# Altium PCB w47_LED_RGB_pinout.PcbDoc (part 2 of 2)
Units mm, origin at the board's own origin, x right, y up, seen from the top; angles counter-clockwise.
Board outline 167.64 x 288.93 mm, 2 copper layers (Top Layer, Bottom Layer); 100 components, 123 nets, 258 pads, 0 vias.
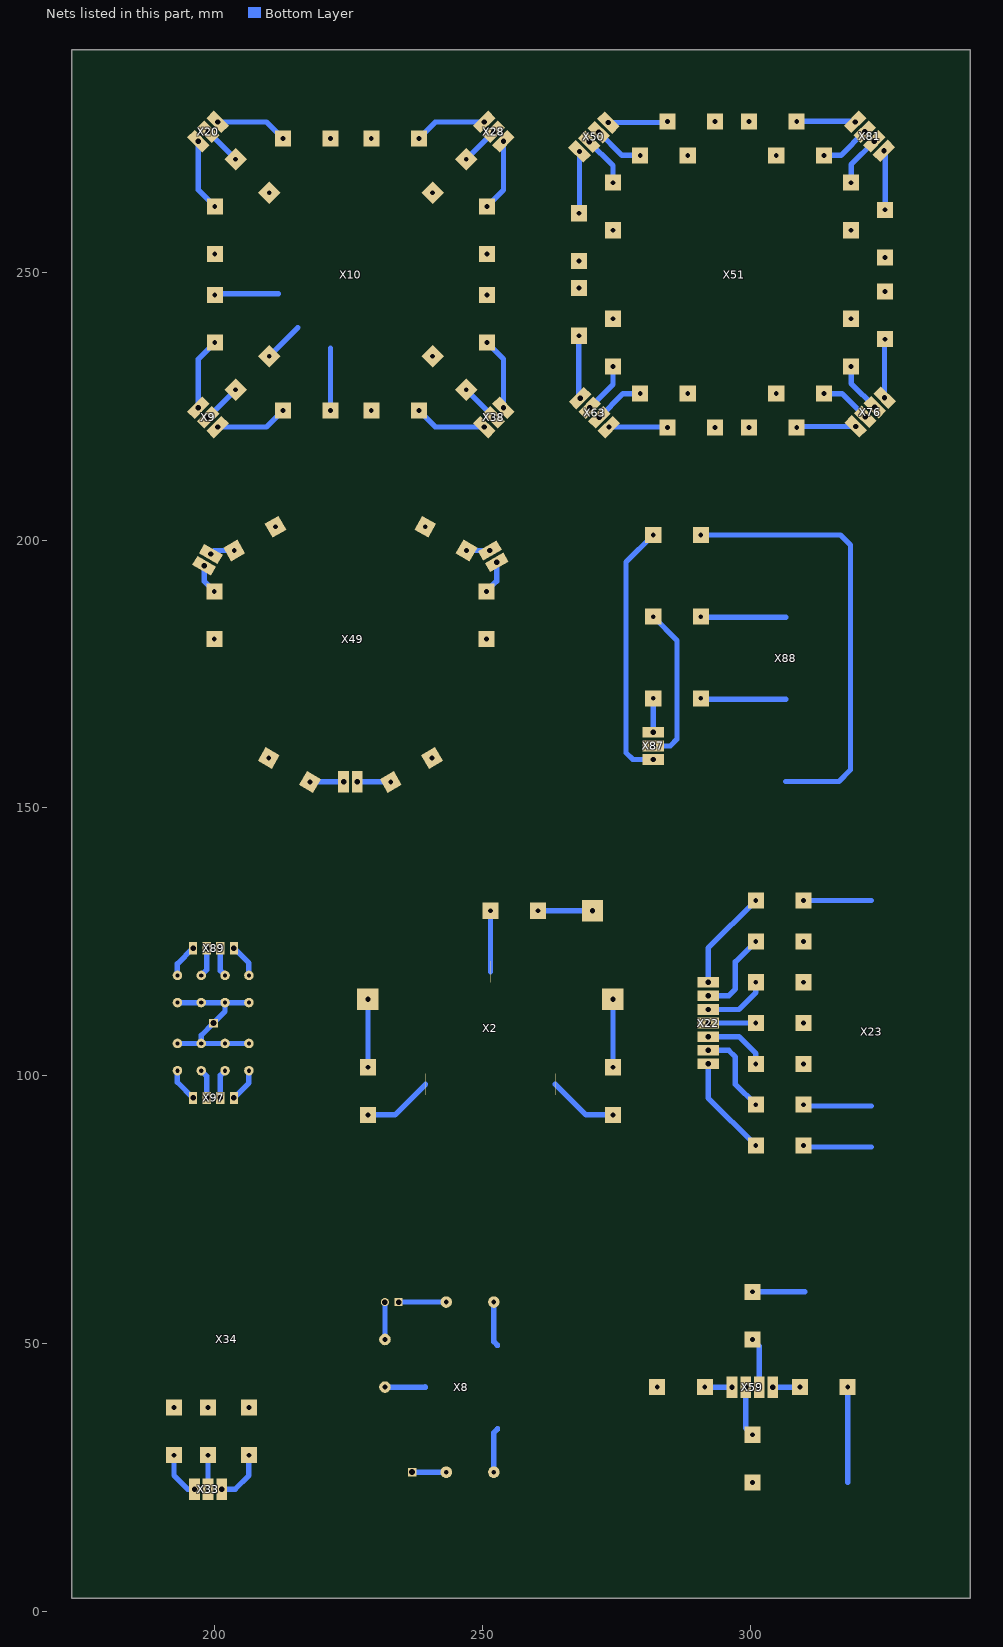
[diagram p2: the nets of this part, all layers, seen from the top]

## Part data
X1 X4 X7 X11 X17 X48 X56 X67 X101: "WR-PHD 2.54 mm Angled Socket Header", Manufacturer="Würth Elektronik eiSos GmbH", partNo=613002143121, ComponentLink1 Description=Manufacturer, ComponentLink1URL=http://www.we-online.com, ComponentLink2 Description=Datasheet, ComponentLink2URL=http://katalog.we-online.de/em/datasheet/6130xx143121.pdf, Created by="Karrer Zheng", Created Date="29 March 2013", NoPins=02
X2: library part MediumQTouchWheel, ConfigurationParameters==__sensorid[8]=odiameter[30]=idiameter[10]=gapthickness[0.3]=, ConfiguratorName=ATMEL_TOUCH
X3 X5 X6 X12 X13 X15 X16 X18 X19 X21 X24 X25 X26 X27 X29 X30 X31 X32 X35 X36 X37 X39 X40 X41 X42 X43 X44 X45 X52 X53 X54 X55 X57 X58 X60 X61 X62 X64 X65 X66 X68 X69 X70 X72 X73 X75 X77 X78 X79 X80 X82 X83 X84 X85 X91 X92 X93: "di?n tr? size nh?"
X8: library part SmallQTouchWheel, ConfigurationParameters==__sensorid[7]=diameter[20]=, ConfiguratorName=ATMEL_TOUCH
X9 X20 X28 X33 X38 X87: "WR-PHD 2.54 mm Angled Socket Header", Manufacturer="Würth Elektronik eiSos GmbH", partNo=613003143121, ComponentLink1 Description=Manufacturer, ComponentLink1URL=http://www.we-online.com, ComponentLink2 Description=Datasheet, ComponentLink2URL=http://katalog.we-online.de/em/datasheet/6130xx143121.pdf, Created by="Karrer Zheng", Created Date="29 March 2013", NoPins=03
X10: library part MediumResQTouchWheel, ConfigurationParameters==__sensorid[9]=odiameter[30]=idiameter[9]=segmentsbetweenchannels[3]=gapthickness[0.3]=, ConfiguratorName=ATMEL_TOUCH
X22: "WR-PHD 2.54 mm Angled Socket Header", Manufacturer="Würth Elektronik eiSos GmbH", partNo=613007143121, ComponentLink1 Description=Manufacturer, ComponentLink1URL=http://www.we-online.com, ComponentLink2 Description=Datasheet, ComponentLink2URL=http://katalog.we-online.de/em/datasheet/6130xx143121.pdf, Created by="Karrer Zheng", Created Date="29 March 2013", NoPins=07
X23: library part MediumQMatrixSlider, ConfigurationParameters==__sensorid[6]=width[50]=height[12]=gapthickness[0.3]=numchannels[4]=segmentsbetweenchannels[1]=ywidth[0.3]=, ConfiguratorName=ATMEL_TOUCH
X34: library part SmallQTouchSlider, ConfigurationParameters==__sensorid[3]=width[25]=height[12]=gapthickness[0.3]=, ConfiguratorName=ATMEL_TOUCH
X46 X47 X71 X74: library part QTouchButton, ConfigurationParameters==__sensorid[1]=width[15]=height[15]=, ConfiguratorName=ATMEL_TOUCH
X49: library part MediumLargeQMatrixWheel, ConfigurationParameters==__sensorid[12]=odiameter[40]=idiameter[16]=channels[6]=segmentsbetweenchannels[0]=gapthickness[0.3]=ywidth[0.3]=, ConfiguratorName=ATMEL_TOUCH
X50 X59 X63 X76 X81 X89 X97: "WR-PHD 2.54 mm Angled Socket Header", Manufacturer="Würth Elektronik eiSos GmbH", partNo=613004143121, ComponentLink1 Description=Manufacturer, ComponentLink1URL=http://www.we-online.com, ComponentLink2 Description=Datasheet, ComponentLink2URL=http://katalog.we-online.de/em/datasheet/6130xx143121.pdf, Created by="Karrer Zheng", Created Date="29 March 2013", NoPins=04
X51: library part MediumResQMatrixWheel, ConfigurationParameters==__sensorid[11]=odiameter[30]=idiameter[7.5]=numberofkeys[4]=segmentsbetweenchannels[3]=gapthickness[0.3]=ywidth[0.3]=, ConfiguratorName=ATMEL_TOUCH
X88: library part MediumQTouchSlider, ConfigurationParameters==__sensorid[4]=width[50]=height[12]=gapthickness[0.3]=, ConfiguratorName=ATMEL_TOUCH

## Nets (pads, with @x,y where several pads share a name; then routed paths per layer and width w, separated by ;. In a path a pad name is that pad's centre, name@x,y a point inside that pad or via, vN(x,y) a via of type N, cw(c..) or ccw(c..) an arc to the next point about the centre after c; other vN are vias at no path point)
NetX1_1: X1.1 X3.1 | length 12.7
  Bottom Layer w1: X3.1@228.6,101.6 X1.1@228.6,114.3
NetX2_1: X2.1 X3.2 | length 13.1
  Bottom Layer w1: X3.2@228.6,92.71 233.636,92.71 X2.1@239.336,98.41
NetX2_2: X2.2 X5.2 | length 11.4
  Bottom Layer w1: X2.2@251.46,119.41 X5.2@251.46,130.81
NetX2_3: X2.3 X6.2 | length 13.1
  Bottom Layer w1: X2.3@263.584,98.41 269.284,92.71 X6.2@274.32,92.71
NetX4_1: X4.1 X5.1 | length 10.2
  Bottom Layer w1: X5.1@260.35,130.81 X4.1@270.51,130.81
NetX6_1: X6.1 X7.1 | length 12.7
  Bottom Layer w1: X6.1@274.32,101.6 X7.1@274.32,114.3
NetX8_1: X8.1 X12.2 | length 7.5
  Bottom Layer w1: X12.2@231.775,41.91 X8.1@239.285,41.91
NetX8_2: X8.2 X15.2 | length 8.4
  Bottom Layer w1: X15.2@252.095,57.785 252.095,50.394 X8.2@252.785,49.704
NetX8_3: X8.3 X18.2 | length 8.4
  Bottom Layer w1: X18.2@252.095,26.035 252.095,33.426 X8.3@252.785,34.116
NetX9_1: X9.1 X19.1 | length 13.4
  Bottom Layer w1: X9.1@200.551,221.089 209.659,221.089 X19.1@212.725,224.155
NetX9_2: X9.2 X16.1 | length 7.3
  Bottom Layer w1: X9.2@198.755,222.885 X16.1@203.899,228.029
NetX9_3: X9.3 X13.1 | length 13.4
  Bottom Layer w1: X9.3@196.959,224.681 196.959,233.789 X13.1@200.025,236.855
NetX10_1: X10.1 X13.2 | length 12
  Bottom Layer w1: X13.2@200.025,245.745 200.212,245.932 211.902,245.932
NetX10_2: X10.2 X16.2 | length 7.6
  Bottom Layer w1: X16.2@210.185,234.315 X10.2@215.525,239.655
NetX10_3: X10.3 X19.2 | length 11.7
  Bottom Layer w1: X19.2@221.615,224.155 221.615,235.846
NetX10_4: X10.4 X21.2
NetX10_5: X10.5 X25.2
NetX10_6: X10.6 X27.2
NetX10_7: X10.7 X30.2
NetX10_8: X10.8 X32.2
NetX10_9: X10.9 X37.2
NetX10_10: X10.10 X41.2
NetX10_11: X10.11 X44.2
NetX10_12: X10.12 X45.2
NetX11_1: X11.1 X15.1 | length 8.9
  Bottom Layer w1: X11.1@234.315,57.785 X15.1@243.205,57.785
NetX11_2: X11.2 X12.1 | length 7
  Bottom Layer w1: X12.1@231.775,50.8 X11.2@231.775,57.785
NetX17_1: X17.1 X18.1 | length 6.3
  Bottom Layer w1: X17.1@236.855,26.035 X18.1@243.205,26.035
NetX20_1: X20.1 X27.1 | length 13.4
  Bottom Layer w1: X20.1@200.551,278.021 209.659,278.021 X27.1@212.725,274.955
NetX20_2: X20.2 X25.1 | length 7.3
  Bottom Layer w1: X20.2@198.755,276.225 X25.1@203.899,271.081
NetX20_3: X20.3 X21.1 | length 13.4
  Bottom Layer w1: X20.3@196.959,274.429 196.959,265.321 X21.1@200.025,262.255
NetX22_1: X22.1 X42.1 | length 18.9
  Bottom Layer w1: X22.1@292.1,117.475 292.1,123.825 X42.1@300.99,132.715
NetX22_2: X22.2 X39.1 | length 16.1
  Bottom Layer w1: X22.2@292.1,114.935 295.91,114.935 297.18,116.205 297.18,121.285 X39.1@300.99,125.095
NetX22_3: X22.3 X35.1 | length 12.1
  Bottom Layer w1: X22.3@292.1,112.395 297.815,112.395 300.99,115.57 X35.1@300.99,117.475
NetX22_4: X22.4 X31.1 | length 8.9
  Bottom Layer w1: X22.4@292.1,109.855 X31.1@300.99,109.855
NetX22_5: X22.5 X29.1 | length 12.1
  Bottom Layer w1: X22.5@292.1,107.315 297.815,107.315 300.99,104.14 X29.1@300.99,102.235
NetX22_6: X22.6 X26.1 | length 16.1
  Bottom Layer w1: X22.6@292.1,104.775 295.91,104.775 297.18,103.505 297.18,98.425 X26.1@300.99,94.615
NetX22_7: X22.7 X24.1 | length 18.9
  Bottom Layer w1: X22.7@292.1,102.235 292.1,95.885 X24.1@300.99,86.995
NetX23_1: X23.1 X24.2 | length 12.8
  Bottom Layer w1: X24.2@309.88,86.995 310.16,86.715 X23.1@322.58,86.715
NetX23_2: X23.2 X26.2 | length 12.8
  Bottom Layer w1: X26.2@309.88,94.615 310.113,94.382 X23.2@322.58,94.382
NetX23_3: X23.3 X29.2
NetX23_4: X23.4 X31.2
NetX23_5: X23.5 X35.2
NetX23_6: X23.6 X39.2
NetX23_7: X23.7 X42.2 | length 12.7
  Bottom Layer w1: X42.2@309.88,132.715 X23.7@322.58,132.715
NetX28_1: X28.1 X37.1 | length 13.4
  Bottom Layer w1: X37.1@250.825,262.255 253.891,265.321 X28.1@253.891,274.429
NetX28_2: X28.2 X32.1 | length 7.3
  Bottom Layer w1: X32.1@246.951,271.081 X28.2@252.095,276.225
NetX28_3: X28.3 X30.1 | length 13.4
  Bottom Layer w1: X30.1@238.125,274.955 241.191,278.021 X28.3@250.299,278.021
NetX33_1: X33.1 X43.1 | length 9.9
  Bottom Layer w1: X33.1@201.295,22.86 203.835,22.86 206.375,25.4 X43.1@206.375,29.21
NetX33_2: X33.2 X40.1 | length 6.3
  Bottom Layer w1: X33.2@198.755,22.86 X40.1@198.755,29.21
NetX33_3: X33.3 X36.1 | length 8.7
  Bottom Layer w1: X36.1@192.405,29.21 192.405,25.4 194.945,22.86 X33.3@196.215,22.86
NetX34_1: X34.1 X36.2
NetX34_2: X34.2 X40.2
NetX34_3: X34.3 X43.2
NetX38_1: X38.1 X45.1 | length 13.4
  Bottom Layer w1: X45.1@238.125,224.155 241.191,221.089 X38.1@250.299,221.089
NetX38_2: X38.2 X44.1 | length 7.3
  Bottom Layer w1: X44.1@246.951,228.029 X38.2@252.095,222.885
NetX38_3: X38.3 X41.1 | length 13.4
  Bottom Layer w1: X41.1@250.825,236.855 253.891,233.789 X38.3@253.891,224.681
NetX46_1: X46.1 X61.2 | length 17.8
  Bottom Layer w1: X46.1@318.135,24.13 X61.2@318.135,41.91
NetX47_1: X47.1 X65.2 | length 9.8
  Bottom Layer w1: X65.2@300.355,59.69 310.135,59.69
NetX48_1: X48.1 X54.1 | length 4.4
  Bottom Layer w1: X54.1@246.993,198.038 X48.1@251.359,198.038
NetX48_2: X48.2 X52.1 | length 6.2
  Bottom Layer w1: X52.1@250.724,190.418 252.629,192.323 X48.2@252.629,195.838
NetX49_1: X49.1 X52.2
NetX49_2: X49.2 X54.2
NetX49_3: X49.3 X57.2
NetX49_4: X49.4 X60.2
NetX49_5: X49.5 X64.2
NetX49_6: X49.6 X68.2
NetX50_1: X50.1 X62.1 | length 11.6
  Bottom Layer w1: X62.1@267.97,260.985 268.079,261.094 X50.1@268.079,272.524
NetX50_2: X50.2 X58.1 | length 9.5
  Bottom Layer w1: X50.2@269.875,274.32 274.32,269.875 X58.1@274.32,266.7
NetX50_3: X50.3 X55.1 | length 9.5
  Bottom Layer w1: X50.3@271.671,276.116 276.007,271.78 X55.1@279.4,271.78
NetX50_4: X50.4 X53.1 | length 11.1
  Bottom Layer w1: X50.4@273.467,277.912 284.262,277.912 X53.1@284.48,278.13
NetX51_1: X51.1 X53.2
NetX51_2: X51.2 X55.2
NetX51_3: X51.3 X58.2
NetX51_4: X51.4 X62.2
NetX51_5: X51.5 X66.2
NetX51_6: X51.6 X70.2
NetX51_7: X51.7 X73.2
NetX51_8: X51.8 X75.2
NetX51_9: X51.9 X77.2
NetX51_10: X51.10 X78.2
NetX51_11: X51.11 X79.2
NetX51_12: X51.12 X80.2
NetX51_13: X51.13 X82.2
NetX51_14: X51.14 X83.2
NetX51_15: X51.15 X84.2
NetX51_16: X51.16 X85.2
NetX56_1: X56.1 X60.1 | length 5.6
  Bottom Layer w1: X56.1@198.019,195.203 198.019,192.323 X60.1@199.924,190.418
NetX56_2: X56.2 X57.1 | length 4.6
  Bottom Layer w1: X56.2@199.289,197.403 199.924,198.038 X57.1@203.655,198.038
NetX59_1: X59.1 X72.1 | length 5.1
  Bottom Layer w1: X72.1@291.465,41.91 X59.1@296.545,41.91
NetX59_2: X59.2 X69.1 | length 9.4
  Bottom Layer w1: X59.2@299.085,41.91 299.085,34.29 X69.1@300.355,33.02
NetX59_3: X59.3 X65.1 | length 9.4
  Bottom Layer w1: X65.1@300.355,50.8 301.625,49.53 X59.3@301.625,41.91
NetX59_4: X59.4 X61.1 | length 5.1
  Bottom Layer w1: X59.4@304.165,41.91 X61.1@309.245,41.91
NetX63_1: X63.1 X75.1 | length 10.9
  Bottom Layer w1: X63.1@273.576,221.089 284.371,221.089 X75.1@284.48,220.98
NetX63_2: X63.2 X73.1 | length 9.5
  Bottom Layer w1: X63.2@271.78,222.885 276.225,227.33 X73.1@279.4,227.33
NetX63_3: X63.3 X70.1 | length 9.5
  Bottom Layer w1: X63.3@269.984,224.681 274.32,229.017 X70.1@274.32,232.41
NetX63_4: X63.4 X66.1 | length 11.7
  Bottom Layer w1: X66.1@267.97,238.125 267.97,226.695 X63.4@268.188,226.477
NetX64_1: X64.1 X67.2 | length 6.3
  Bottom Layer w1: X64.1@217.783,154.858 X67.2@224.054,154.858
NetX67_1: X67.1 X68.1 | length 6.3
  Bottom Layer w1: X67.1@226.594,154.858 X68.1@232.865,154.858
NetX69_2: X69.2 X71.1
NetX72_2: X72.2 X74.1
NetX76_1: X76.1 X80.1 | length 10.9
  Bottom Layer w1: X76.1@325.011,226.586 325.011,237.381 X80.1@325.12,237.49
NetX76_2: X76.2 X79.1 | length 9.5
  Bottom Layer w1: X79.1@318.77,232.41 318.77,229.235 X76.2@323.215,224.79
NetX76_3: X76.3 X78.1 | length 9.5
  Bottom Layer w1: X78.1@313.69,227.33 317.083,227.33 X76.3@321.419,222.994
NetX76_4: X76.4 X77.1 | length 11.1
  Bottom Layer w1: X77.1@308.61,220.98 308.828,221.198 X76.4@319.623,221.198
NetX81_1: X81.1 X85.1 | length 10.9
  Bottom Layer w1: X85.1@308.61,278.13 319.405,278.13 X81.1@319.514,278.021
NetX81_2: X81.2 X84.1 | length 9.5
  Bottom Layer w1: X84.1@313.69,271.78 316.865,271.78 X81.2@321.31,276.225
NetX81_3: X81.3 X83.1 | length 9.5
  Bottom Layer w1: X83.1@318.77,266.7 318.77,270.093 X81.3@323.106,274.429
NetX81_4: X81.4 X82.1 | length 11.1
  Bottom Layer w1: X81.4@324.902,272.633 325.12,272.415 X82.1@325.12,261.62
NetX86_1: X86.1 X89.4 | length 6.3
  Bottom Layer w1: X86.1@193.04,118.745 193.04,120.901 X89.4@195.964,123.825
NetX86_2: X86.2 X90.2 X94.2 X95.2 X96.2 X98.2 X99.2 X100.2 X101.1 | length 36.1
  Bottom Layer w1: X96.2@193.04,106.045 X98.2@197.485,106.045 ; X86.2@193.04,113.665 X90.2@197.485,113.665 X94.2@201.93,113.665 ; X100.2@206.375,106.045 X99.2@201.93,106.045 X98.2@197.485,106.045 ; X95.2@206.375,113.665 X94.2@201.93,113.665 ; X98.2@197.485,106.045 197.485,107.566 X101.1@199.774,109.855 201.93,112.011 X94.2@201.93,113.665
NetX87_1: X87.1 X93.1 | length 6.3
  Bottom Layer w1: X87.1@281.839,164.111 X93.1@281.839,170.461
NetX87_2: X87.2 X92.1 | length 29.7
  Bottom Layer w1: X87.2@281.839,161.571 285.014,161.571 286.284,162.841 286.284,181.256 X92.1@281.839,185.701
NetX87_3: X87.3 X91.1 | length 48.4
  Bottom Layer w1: X87.3@281.839,159.031 278.029,159.031 276.759,160.301 276.759,195.861 X91.1@281.839,200.941
NetX88_1: X88.1 X91.2 | length 83.6
  Bottom Layer w1: X91.2@290.729,200.941 X88.1@306.604,200.941 316.764,200.941 318.669,199.036 318.669,157.126 316.484,154.941 X88.1@306.604,154.941
NetX88_2: X88.2 X92.2 | length 15.9
  Bottom Layer w1: X92.2@290.729,185.701 290.822,185.607 X88.2@306.604,185.607
NetX88_3: X88.3 X93.2 | length 16
  Bottom Layer w1: X93.2@290.729,170.461 290.915,170.274 X88.3@306.604,170.274
NetX89_1: X89.1 X95.1 | length 6.2
  Bottom Layer w1: X89.1@203.584,123.825 206.375,121.034 X95.1@206.375,118.745
NetX89_2: X89.2 X94.1 | length 5.4
  Bottom Layer w1: X89.2@201.044,123.825 201.044,119.631 X94.1@201.93,118.745
NetX89_3: X89.3 X90.1 | length 5.5
  Bottom Layer w1: X90.1@197.485,118.745 198.504,119.764 X89.3@198.504,123.825
NetX96_1: X96.1 X97.4 | length 6.3
  Bottom Layer w1: X96.1@193.04,100.965 193.04,98.809 X97.4@195.964,95.885
NetX97_1: X97.1 X100.1 | length 6.2
  Bottom Layer w1: X97.1@203.584,95.885 206.375,98.676 X100.1@206.375,100.965
NetX97_2: X97.2 X99.1 | length 5.4
  Bottom Layer w1: X97.2@201.044,95.885 201.044,100.079 X99.1@201.93,100.965
NetX97_3: X97.3 X98.1 | length 5.5
  Bottom Layer w1: X98.1@197.485,100.965 198.504,99.946 X97.3@198.504,95.885
pads on no net: X23.Y X49.Y X51.Y
copper on no net: | length 518.6
  Bottom Layer w1: 192.405,38.1 191.717,38.788 191.717,50.8 191.717,59.637 193.675,61.595 210.82,61.595 212.725,59.69 ; 198.042,50.8 198.042,38.813 198.755,38.1 ; 199.924,181.528 206.274,181.528 ; 200.212,253.178 211.902,253.178 ; 206.375,38.1 206.375,50.8 ; 210.084,159.333 215.824,165.073 ; 210.185,264.795 215.525,259.455 ; 211.354,202.452 215.824,197.982 ; 212.7,50.8 212.7,59.665 ; 221.802,263.078 221.802,274.768 ; 229.048,224.342 229.048,236.032 ; 229.048,263.078 229.048,274.768 ; 231.775,41.91 238.65,41.91 ; 231.775,50.8 231.775,57.785 ; 234.824,165.073 240.564,159.333 ; 234.824,197.982 234.824,198.013 239.294,202.483 ; 235.325,239.655 240.665,234.315 ; 235.325,259.455 240.665,264.795 ; 238.948,245.932 250.638,245.932 ; 238.948,253.178 250.638,253.178 250.825,253.365 ; 244.324,181.528 250.724,181.528 ; 268.161,246.824 282.814,246.824 ; 268.161,252.286 282.814,252.286 ; 274.32,241.3 284.427,241.3 284.904,241.777 ; 274.32,257.81 284.427,257.81 284.904,257.333 ; 282.575,24.13 300.355,24.13 ; 282.575,41.91 282.575,59.69 ; 288.29,227.33 288.29,237.437 288.767,237.914 ; 288.29,271.78 288.29,261.673 288.767,261.196 ; 293.37,220.98 293.814,221.424 293.814,235.824 ; 293.37,278.13 293.814,277.686 293.814,263.286 ; 299.276,235.824 299.276,221.424 299.72,220.98 ; 299.276,263.286 299.276,277.686 299.72,278.13 ; 304.323,237.914 304.8,237.437 304.8,227.33 ; 304.323,261.196 304.8,261.673 304.8,271.78 ; 308.186,241.777 308.663,241.3 318.77,241.3 ; 308.186,257.333 308.663,257.81 318.77,257.81 ; 309.927,125.048 312.467,125.048 322.58,125.048 ; 309.973,117.382 322.58,117.382 ; 310.02,109.715 312.56,109.715 322.58,109.715 ; 310.067,102.048 312.607,102.048 322.58,102.048 ; 310.276,246.824 310.72,246.38 325.12,246.38 ; 310.276,252.286 324.676,252.286

## Polygon pours and split planes (outlines as drawn)
no net on Bottom Layer "Bottom Layer-No Net" (hatched 45Degree grid 3 track 0.7, pour order 44): 180.975,77.47 180.975,7.62 221.615,7.62 221.615,77.47
no net on Bottom Layer "Bottom Layer-No Net" (hatched 45Degree grid 3 track 0.7, pour order 40): 265.43,77.47 265.43,7.62 335.28,7.62 335.28,77.47
no net on Bottom Layer "Bottom Layer-No Net" (hatched 45Degree grid 3 track 0.7, pour order 36): 219.075,141.605 219.075,78.74 282.575,78.74 282.575,141.605
no net on Bottom Layer "Bottom Layer-No Net" (hatched 45Degree grid 3 track 0.7, pour order 34): 283.845,141.605 283.845,78.74 335.28,78.74 335.28,141.605
no net on Bottom Layer "Bottom Layer-No Net" (hatched 45Degree grid 3 track 0.7, pour order 30): 261.62,213.36 261.62,143.51 331.47,143.51 331.47,213.36
no net on Bottom Layer "Bottom Layer-No Net 1" (hatched 45Degree grid 3 track 0.7, pour order 24): 190.5,213.36 190.5,143.51 260.35,143.51 260.35,213.36
no net on Bottom Layer "Bottom Layer-No Net" (hatched 45Degree grid 3 track 0.7, pour order 38): 180.975,141.605 180.975,78.74 217.805,78.74 217.805,141.605
no net on Bottom Layer "Bottom Layer-No Net" (hatched 45Degree grid 3 track 0.7, pour order 42): 222.885,77.47 222.885,7.62 264.16,7.62 264.16,77.47
no net on Bottom Layer "Bottom Layer-No Net" (hatched 45Degree grid 3 track 0.7, pour order 28): 190.5,284.48 190.5,214.63 260.35,214.63 260.35,284.48
no net on Bottom Layer "Bottom Layer-No Net" (hatched 45Degree grid 3 track 0.7, pour order 26): 261.574,284.425 261.574,214.575 331.424,214.575 331.424,284.425
no net on Bottom Layer "Bottom Layer-No Net 2" (hatched 45Degree grid 3 track 0.7, pour order 22): 260.249,143.428
no net on Bottom Layer "Bottom Layer-No Net 3" (hatched 45Degree grid 3 track 0.7, pour order 20): 260.249,142.793

## Keep-outs
Keep-Out Layer:
  the board outline again, w0.254

## Other copper
Bottom Layer:
  region: 339.725,139.7